# Altium PCB PCB1.PcbDoc (part 2 of 2)
Units mm, origin at the board's own origin, x right, y up, seen from the top; angles counter-clockwise.
Board outline 28 x 30 mm, 4 copper layers (Top Layer, GND, POWER, Bottom Layer), stack 0.778 mm thick; 63 components, 74 nets, 532 pads, 184 vias.
Unrouted connection lines stored in the file: 4.
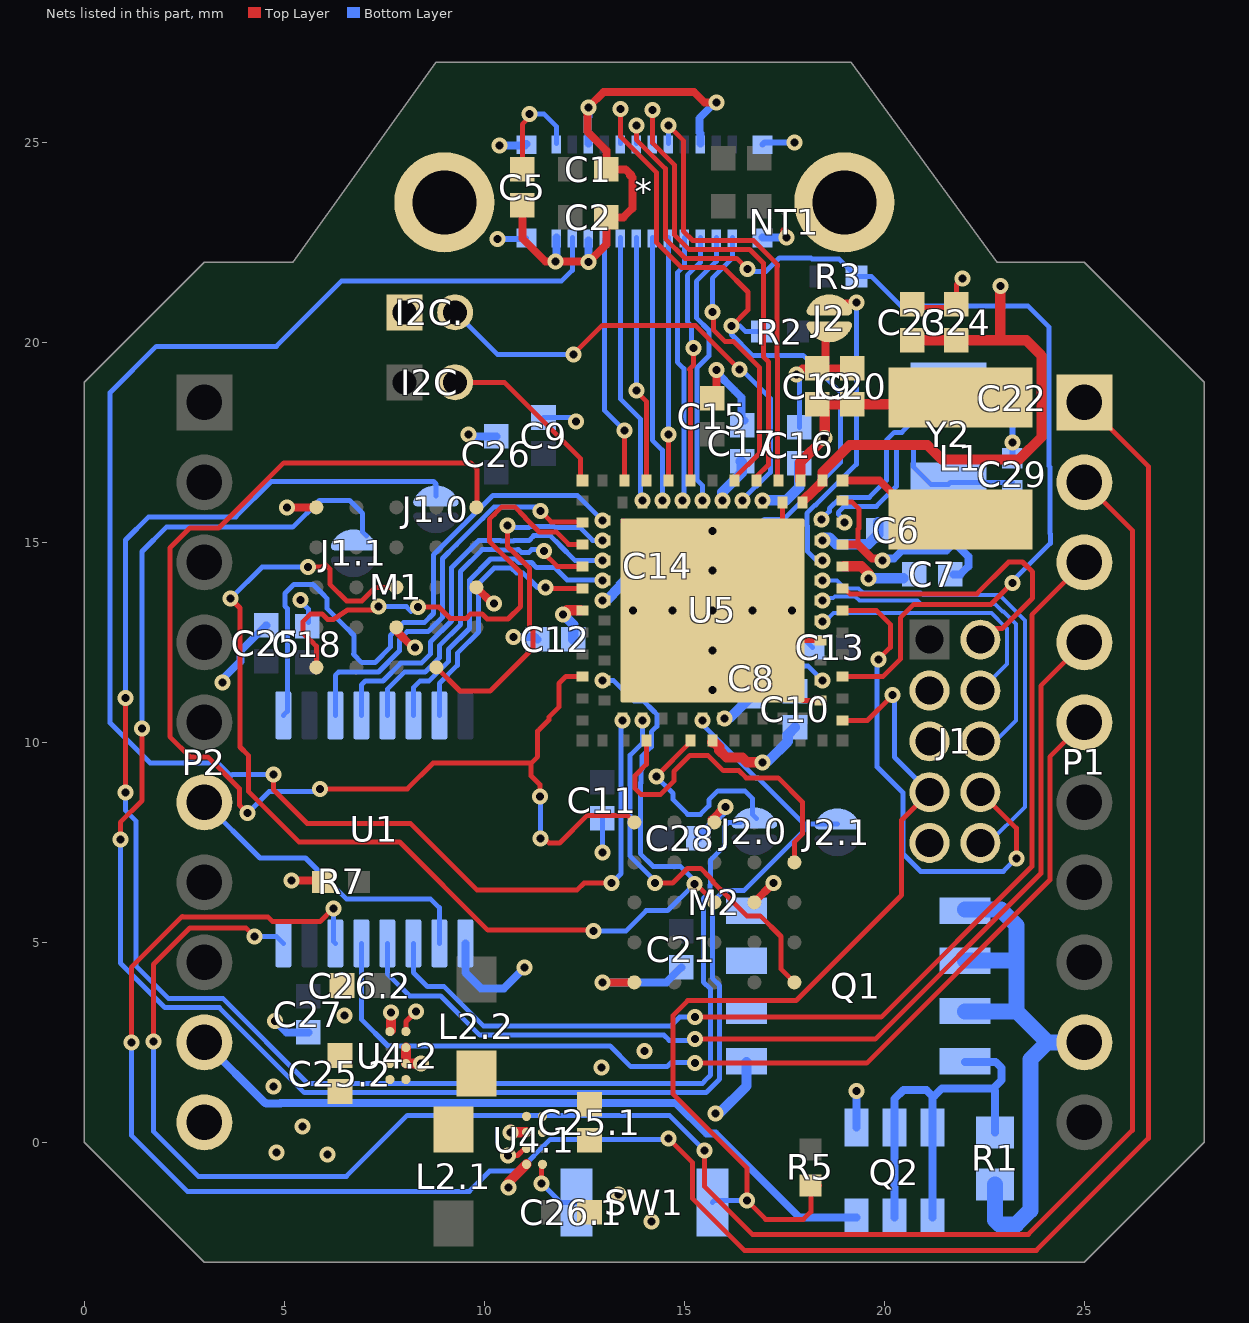
[diagram p4: the nets of this part, all layers, seen from the top]

## Via types
v1: diameter 0.4, hole 0.2, Top Layer to Bottom Layer, tented both sides, 184 vias

## Nets (pads, with @x,y where several pads share a name; then routed paths per layer and width w, separated by ;. In a path a pad name is that pad's centre, name@x,y a point inside that pad or via, vN(x,y) a via of type N, cw(c..) or ccw(c..) an arc to the next point about the centre after c; other vN are vias at no path point) (continued)
DQ7: M1.E1 M2.E1 U5.A9 | length 32.5
  Top Layer w0.125: v1(4.079,8.228) 3.874,8.433 3.874,8.845 3.082,9.637 2.643,9.637 2.137,10.143 2.137,14.137 2.14,14.14 2.137,14.143 2.137,14.857 2.643,15.363 3.357,15.363 3.36,15.36 4.988,16.988 9.661,16.988 9.813,16.836 9.813,15.888 M1.E1@9.8,15.875 ; v1(5.889,8.839) 8.075,8.839 8.716,9.48 11.172,9.48 ; v1(11.392,8.648) 11.392,8.94 11.172,9.159 11.172,9.48 ; v1@11.4,7.7 11.62,7.48 11.88,7.48 12.575,8.175 13.575,8.175 M2.E1@13.75,8 ; U5.A9@12.4,11.65 12.04,11.65 11.862,11.472 11.862,10.878 11.615,10.63 11.615,10.557 11.402,10.344 11.335,10.277 11.335,9.643 11.172,9.48
  Bottom Layer w0.125: v1@4.079,8.254 v1(4.079,8.228) 4.622,8.772 5.822,8.772 v1(5.889,8.839) ; v1(11.392,8.648) 11.37,8.626 11.4,8.596 v1@11.4,7.7
  other v1: 11.4,7.6
GND: *.0 *.3 *.10 *.13 *.15 C1.1 C2.1 C5.2 C6.1 C7.1 C8.1 C9.1 C10.1 C11.1 C12.1 C13.1 C14.1 C15.1 C16.1 C17.1 C18.1 C19.1 C20.1 C21.1 C22.1 C23.1 C24.1 C25.1 C25.1.1 C25.2.1 C26.1 C26.1.1 C26.2.1 C27.2 C28.1 C29.1 I2C..1 J1.3 J1.5 J1.9 J2.2 M1.B3 M1.C1 M1.E5 M2.B3 M2.C1 M2.E5 NT1.2 P2.10 pad.H1 pad.H2 Q2.4 R7.1 SW1.2 U1.9 U4.1.B2 U4.1.C1 U4.1.D2 U4.2.B2 U4.2.D1 U5.A31 U5.A33 U5.B21 U5.B24 U5.B32 U5.PAD | length 76.1
  Top Layer w0.125: U4.2.D1@8.04,2.77 8.04,3.02 v1(8.29,3.27) ; v1(10.598,-0.328) 10.832,-0.328 11.009,-0.15 U4.1.C1@11.054,-0.15 ; v1(11.429,-1.025) 11.429,-0.575 U4.1.D2@11.454,-0.55 ; U5.PAD@14.7,11.313 15.187,11.313 15.262,11.388 15.262,12.862 U5.PAD@15.7,13.3 ; U5.PAD@14.95,14.05 U5.PAD@15.7,13.3 ; U5.B32@17.45,16 17.45,15.05 U5.PAD@15.7,13.3 ; U5.B21@18.4,11.05 17.95,11.05 U5.PAD@16.5,12.5 ; U5.B24@18.4,12.55 16.55,12.55 U5.PAD@16.5,12.5 ; U5.A33@18.95,16.05 18.995,16.005 19.195,16.005 19.362,15.837 19.362,15.35 19.34,15.327 19.34,14.95 ; C23.1@20.625,20.875 21.8,20.875 C24.1@21.8,20.95 21.8,21.45 v1(21.95,21.6) ; U5.PAD@15.7,13.3 U5.PAD@16.5,12.5
  Top Layer w0.15: U5.PAD@13.475,15.525 U5.PAD@14.95,14.05
  Top Layer w0.2: v1(5.065,15.875) M1.E5@5.8,15.875 ; v1(5.175,6.55) 5.93,6.55 R7.1@5.97,6.51 ; M1.B3@7.8,12.875 7.795,12.875 7.795,12.795 8.225,12.365 v1(8.265,12.365) ; M1.C1@9.8,13.875 10.22,13.455 10.235,13.47 v1(10.24,13.47) ; C5.2@10.95,23.425 10.95,22.6 11.525,22.025 v1(11.775,22.025) 12.584,22.025 v1(12.605,22.004) 13.05,22.449 C2.1@13.05,23.125 13.475,23.125 13.7,23.35 13.7,24.118 13.647,24.172 ; v1(12.95,4) M2.E5@13.75,4 ; 13.664,24.189 13.529,24.325 C1.1@13.05,24.325 13.05,24.799 12.575,25.274 12.575,25.85 v1(12.6,25.875) 12.979,26.254 15.246,26.254 15.5,26 v1(15.8,26) ; C15.1@15.7,18.6 15.805,18.705 v1(15.805,19.304) ; M2.C1@15.75,8 15.684,8.066 16,8.381 16.003,8.378 v1(16.03,8.378) ; M2.B3@16.75,6 v1(17.23,6.48) ; v1@17.5,22.675 NT1.2@17.5,22.8 ; U5.A31@19,14.95 19.3,14.95
  Top Layer w0.203: v1(17.8,19.2) 17.95,19.35 C19.1@18.325,19.35 ; J2.2@18.625,20.262 18.533,20.171 18.533,19.558 C19.1@18.325,19.35 ; C20.1@19.2,19.35 C19.1@18.325,19.35 ; 19.3,14.95 19.34,14.95 19.69,14.6 20,14.6 v1@20.001,14.601
  Bottom Layer w0.125: v1(5.404,13.563) 5.369,13.563 5.6,13.333 C18.1@5.6,13 ; v1@10.279,22.579 v1(10.33,22.579) ; *.0@11.019,22.579 *.0@11.05,22.61 ; v1(11.429,-1.025) 11.904,-1.5 SW1.2@12.3,-1.5 ; C9.1@11.48,18.12 12.19,18.12 v1(12.29,18.02) ; v1(12.95,7.25) C11.1@12.95,8.1 ; U5.PAD@15.7,12.3 15.75,12.3 16,12.05 C8.1@16.675,12.05 17.343,11.382 17.661,11.382 C10.1@17.768,11.275 C10.1@17.825,11.332 ; U5.PAD@17.687,13.3 17.687,12.888 C13.1@18.2,12.375 ; C16.1@17.875,17.875 v1@17.875,19.125
  Bottom Layer w0.15: v1(10.33,22.579) *.0@11.019,22.579 ; *.0@16.95,24.94 17.01,25 v1(17.75,25) ; C29.1@23.2,17.1 C22.1@23.2,18.2
  Bottom Layer w0.2: v1(3.45,11.5) 3.375,11.5 3.9,12.025 3.9,12.278 4.547,12.925 C25.1@4.55,12.925 ; v1(4.77,3.03) 5.05,2.75 C27.2@5.6,2.75 ; U1.9@9.525,4.975 9.525,4.245 9.92,3.85 10.49,3.85 v1(11.01,4.37) ; v1(9.6,17.7) 9.65,17.65 C26.1@10.3,17.65 ; v1(10.375,24.925) 11.02,24.925 *.0@11.05,24.955 ; v1(10.73,12.63) 11.27,12.63 C12.1@11.325,12.575 ; v1@11.8,22.2 *.13@11.8,22.615 ; *.15@12.6,22.55 12.6,22.009 v1(12.605,22.004) ; *.10@12.6,24.965 12.6,25.249 12.575,25.274 12.575,25.626 12.6,25.651 v1(12.6,25.875) ; v1(12.95,4) 14.55,4 C21.1@14.925,4.375 ; C14.1@14.786,14.408 14.996,14.198 15.7,14.198 U5.PAD@15.7,13.3 U5.PAD@15.7,12.35 ; C28.1@15.35,7.6 15.35,7.621 16,8.271 v1@16,8.4 ; *.3@15.4,24.965 15.4,25.224 15.375,25.249 15.375,25.601 15.774,26 v1(15.8,26) ; v1(15.805,19.304) 15.805,19.244 16.249,18.8 16.425,18.625 16.425,18.125 C17.1@16.5,18.05 ; *.0@16.95,22.625 v1(17.55,22.625) ; Q2.4@19.3,0.375 v1(19.3,1.28) ; v1(19.95,14.55) 20,14.6 20.247,14.6 20.447,14.8 21.551,14.8 21.75,14.999 ; C6.1@20.75,15.5 21.275,15.5 21.75,15.025 21.75,14.999 ; C7.1@21.725,14.2 21.9,14.2 22.1,14.4 22.1,14.649 21.75,14.999
  other v1: 14.175,-1.975 13.35,-1.3 6.5,3.175 23.2,17.5
GPIO_A2_1V8: U1.3 U5.A2 | length 10
  Top Layer w0.125: v1(11.4,15.78) 11.67,15.51 12.39,15.51 U5.A2@12.4,15.5
  Bottom Layer w0.125: U1.3@6.275,10.675 6.275,11.675 6.36,11.76 7.352,11.76 7.877,12.285 7.877,12.575 8.069,12.767 8.594,12.767 8.638,12.812 ; 8.672,12.846 8.952,13.126 8.952,14.594 9.296,14.938 9.299,14.938 9.963,15.601 9.963,15.604 10.246,15.887 11.293,15.887 v1(11.4,15.78)
GPIO_A2_3V0: P1.1 U1.14 | length 59.4
  Top Layer w0.125: v1(1.175,2.5) 1.175,4.375 2.45,5.65 2.462,5.637 4.588,5.637 4.71,5.515 5.89,5.515 v1(6.225,5.85) ; v1(14.6,0.1) 15.2,-0.5 15.2,-1.4 16.5,-2.7 23.8,-2.7 26.6,0.1 26.6,16.9 P1.1@25,18.5
  Bottom Layer w0.125: v1(1.175,2.5) 1.175,0.175 2.575,-1.225 9.625,-1.225 10.135,-0.715 10.86,-0.715 11.649,0.074 14.626,0.074 v1(14.6,0.1) ; v1(6.225,5.85) 6.225,5.025 U1.14@6.275,4.975
GPIO_A3_1V8: U1.1 U5.B1 | length 15.4
  Bottom Layer w0.125: U1.1@4.975,10.675 5.076,10.776 5.076,13.344 5.017,13.403 5.017,13.724 5.244,13.951 5.662,13.951 5.663,13.95 5.716,13.95 6.009,13.657 6.007,13.655 6.072,13.59 6.072,13.34 6.563,12.85 6.565,12.85 6.742,12.673 6.742,12.218 6.728,12.204 6.939,11.992 7.267,11.992 7.652,12.378 7.652,12.668 7.976,12.992 8.5,12.992 8.727,13.219 8.727,14.687 9.203,15.163 9.204,15.163 9.229,15.188 9.231,15.188 9.443,15.4 9.443,15.402 9.738,15.696 9.738,15.722 9.775,15.76 9.8,15.76 10.215,16.175 12.325,16.175 v1(12.95,15.55)
GPIO_A3_3V0: P1.2 U1.16 | length 53.1
  Top Layer w0.125: v1(1.725,2.525) 1.725,4.445 2.643,5.363 4.037,5.363 v1(4.25,5.15) ; v1(15.5,-0.2) 15.5,-1.1 16.7,-2.3 23.6,-2.3 26.2,0.3 26.2,15.3 P1.2@25,16.5 P1.2@25.025,16.5
  Bottom Layer w0.125: v1(1.725,2.525) 1.725,0.275 2.85,-0.85 6.55,-0.85 8.075,0.675 14.625,0.675 v1(15.5,-0.2) ; v1(4.25,5.15) 4.8,5.15 U1.16@4.975,4.975
HYPER.RWDS: M1.C3 M2.C3 U5.B9 | length 31.2
  Top Layer w0.125: v1(3.66,13.59) 3.892,13.358 3.892,9.882 4.099,9.674 4.099,8.774 5.361,7.513 7.879,7.513 10.089,5.302 10.411,5.302 10.418,5.31 12.73,5.31 v1(12.73,5.28) v1@12.82,5.28 ; v1(5.588,14.38) 5.943,14.38 6.017,14.453 6.138,14.332 6.138,13.952 6.553,13.537 6.94,13.537 7.277,13.875 M1.C3@7.8,13.875 ; v1@15.25,6.46 15.27,6.48 M2.C3@15.75,6
  Bottom Layer w0.125: v1@3.662,13.6 4.442,14.38 v1(5.588,14.38) ; v1(12.73,5.28) 13.538,5.28 14.047,5.79 14.579,5.79 v1@15.245,6.455 ; v1(12.95,11.55) 13.225,11.55 13.738,11.037 13.975,11.037 14.231,10.781 14.313,10.7 14.313,10.4 14.175,10.262 14.175,9.887 13.946,9.658 13.946,9.334 13.912,9.3 13.912,8.979 ; 13.9,9 13.9,7.218 14.218,6.9 14.9,6.9 15.2,6.6 v1@15.2,6.5
  other v1: 15.25,6.46
Mem_\R\S\T\O\1: M1.A2 U5.B2 | length 9.1
  Top Layer w0.125: M1.A2@8.8,11.875 9.393,11.282 10.146,11.282 11.217,12.354 11.217,12.79 11.132,12.875 11.132,14.081 11.132,14.348 10.645,14.835 10.635,14.835 10.575,14.895 v1(10.575,15.425)
  Bottom Layer w0.125: v1@10.507,15.392 v1@10.6,15.392 ; v1(10.575,15.425) 10.625,15.375 11.114,15.375 11.132,15.392 11.743,15.392 11.761,15.375 12.362,15.375 12.374,15.386 ; 12.372,15.388 12.374,15.386 ; 12.375,15.388 12.374,15.386 ; v1(12.95,15.05) 12.71,15.05 12.374,15.386
Mem_\R\S\T\O\2: M2.A2 U5.A14 | length 8.1
  Top Layer w0.125: U5.A14@14.05,10 14.05,9.448 13.772,9.17 13.772,8.839 13.912,8.7 14.408,8.7 14.738,9.03 14.738,9.269 15.143,9.675 15.588,9.675 15.973,9.29 16.368,9.29 16.545,9.112 17.348,9.112 17.95,8.51 17.95,7.703 17.75,7.503 M2.A2@17.75,7
Mem_INT1: M1.A5 U5.A3 | length 12.5
  Top Layer w0.125: M1.A5@5.8,11.875 5.8,12.405 5.668,12.537 5.66,12.537 5.462,12.735 5.462,13.015 5.66,13.213 5.94,13.213 6.079,13.074 6.226,13.074 6.587,13.312 7.282,13.312 v1(7.36,13.39) ; v1(8.34,13.38) 8.862,13.38 8.892,13.35 9.144,13.098 9.545,13.098 9.66,13.213 9.94,13.213 10.07,13.082 10.592,13.082 10.907,13.397 10.907,14.174 10.907,14.245 10.125,15.027 10.125,15.575 10.25,15.7 ; 10.252,15.7 10.439,15.887 10.76,15.887 11.012,15.635 11.012,15.619 11.38,15.252 11.808,15.252 12.11,14.95 U5.A3@12.4,14.95
  Bottom Layer w0.125: v1(7.36,13.39) 8.05,13.39 8.17,13.27
Mem_INT2: M2.A5 U5.B12 | length 9.8
  Top Layer w0.125: v1(14.27,6.48) 14.705,6.48 14.845,6.62 14.887,6.662 14.89,6.662 15.075,6.847 15.097,6.847 15.1,6.85 ; 15.088,6.85 15.1,6.85 ; M2.A5@17.75,4 17.412,4.338 17.412,5.14 17.416,5.144 16.898,5.662 16.563,5.662 16.088,6.137 16.088,6.14 15.89,6.338 15.887,6.338 15.712,6.513 15.712,6.538 15.637,6.613 15.637,6.62 15.408,6.85 15.1,6.85
  Bottom Layer w0.125: v1(13.95,10.55) 13.95,9.98 13.648,9.678 13.648,7.152 14.27,6.53 v1(14.27,6.48)
Net*_12: *.12 C5.1 | length 2.7
  Top Layer w0.125: C5.1@10.95,24.325 10.95,25.45 11.13,25.63 v1(11.13,25.704)
  Bottom Layer w0.125: v1(11.13,25.704) 11.496,25.704 11.8,25.4 *.12@11.8,24.965
NetC22_2: C22.2 U5.B30 Y2.1 | length 7.2
  Top Layer w0.125: v1(18.426,15.574) U5.B30@18.45,15.55
  Bottom Layer w0.125: v1(18.426,15.574) 18.462,15.61 18.626,15.774 18.626,15.844 18.907,16.125 19.625,16.125 20.05,16.55 20.05,17.55 20.25,17.75 20.438,17.75 20.713,18.025 20.713,18.413 20.737,18.437 20.737,18.463 21.225,18.95 Y2.1@21.6,18.95 21.673,18.877 21.673,18.8 C22.2@23.2,18.8
NetC29_2: C29.2 U5.A32 Y2.2 | length 6.7
  Bottom Layer w0.125: v1(19,15.5) 19,15.551 18.851,15.7 18.851,15.751 19,15.9 19.8,15.9 20.3,16.4 20.3,17.4 20.4,17.5 20.653,17.5 20.726,17.427 20.726,16.887 21.164,16.45 Y2.2@21.6,16.45 21.65,16.5 C29.2@23.2,16.5
NetJ1.0_1: J1.0.1 J2.0.1 U5.A16 | length 47.1
  Top Layer w0.125: v1(1.025,8.75) 1.03,8.755 v1(1.03,11.11) ; v1(14.3,9.14) 14.29,9.14 U5.A16@15.15,10
  Bottom Layer w0.125: v1(1.025,8.75) 1.025,8.3 1.288,8.037 1.288,4.412 2.11,3.59 3.47,3.59 5.592,1.468 15.449,1.468 15.51,1.529 15.51,1.535 15.657,1.682 15.657,3.827 15.475,4.009 15.475,6.098 15.637,6.26 15.637,6.437 15.65,6.45 15.65,7.05 16,7.4 16,7.9 16.091,7.991 16.391,7.991 J2.0.1@16.4,8 ; v1(1.03,11.11) 1.03,15.06 1.607,15.637 3.787,15.637 4.67,16.52 8.73,16.52 8.79,16.46 J1.0.1@8.79,16.163 J1.0.1@8.79,16.16 ; v1(14.3,9.14) 14.72,8.72 14.72,8.565 15.085,8.2 15.4,8.2 15.612,8.412 15.612,8.56 15.839,8.787 16.513,8.787 16.7,8.6 16.7,8.2 J2.0.1@16.8,8.1
NetJ1.1_1: J1.1.1 J2.1.1 U5.B15 | length 46
  Top Layer w0.125: v1(0.9,7.575) 0.9,8 1.44,8.54 v1(1.44,10.35)
  Bottom Layer w0.125: v1(0.9,7.575) 0.9,4.482 2.017,3.365 3.377,3.365 5.499,1.243 15.542,1.243 15.882,1.582 15.882,3.92 15.7,4.102 15.7,6.005 15.995,6.3 16.498,6.3 17.988,7.79 17.988,7.963 ; v1(1.44,10.35) 1.44,14.77 2.05,15.38 5.21,15.38 5.877,16.047 6.633,16.047 6.96,15.72 6.96,15.255 6.972,15.243 6.985,15.23 J1.1.1@7.06,15.155 ; v1(15.45,10.55) 15.45,10.452 16.789,9.112 16.838,9.112 17.988,7.963 ; J2.1.1@18.825,7.963 17.988,7.963
NetJ2_1: J2.1 U5.B28 | length 7.9
  Top Layer w0.15: J2.1@18.625,20.92 18.705,21 v1(19.3,21)
  Bottom Layer w0.125: v1(18.45,14.55) 18.3,14.55 18.075,14.775 18.075,15.412 18.063,15.424 18.063,15.724 18.276,15.937 18.289,15.937 19.3,16.948 v1(19.3,21)
NetL1_2: L1.2 U5.D4 | length 3.4
  Top Layer w0.2: U5.D4@19,16.6 19,16.55 19.873,16.55 20.848,15.575 L1.2@21.898,15.575
NetL2.1_1: L2.1.1 U4.1.A1
NetL2.2_1: L2.2.1 U4.2.A1
NetQ1_4: Q1.4 Q2.1 Q2.2 Q2.5 Q2.6 R1.1 | length 11.4
  Bottom Layer w0.2: Q2.2@20.25,-1.875 Q2.5@20.25,0.375 20.25,1.08 20.48,1.31 21.05,1.31 21.2,1.16 ; Q2.1@21.2,-1.875 Q2.6@21.2,0.375 21.2,1.16 ; Q1.4@22.02,2.005 22.785,2.005 22.935,1.855 22.935,1.555 22.73,1.35 22.7,1.35 ; R1.1@22.77,0.25 22.77,1.28 22.7,1.35 ; 21.2,1.16 21.25,1.16 21.44,1.35 22.7,1.35
POWER_EN1: P2.9 Q2.3 | length 18.1
  Bottom Layer w0.2: P2.9@3,2.5 4.52,0.98 4.544,0.98 4.549,0.975 4.901,0.975 4.906,0.98 14.794,0.98 15.549,0.225 15.775,0.225 17.875,-1.875 Q2.3@19.3,-1.875
PULP_\R\S\T\: J1.7 R5.1 SW1.1 U5.A23 | length 23.3
  Top Layer w0.125: R5.1@18.375,-1.075 18.263,-1.187 18.163,-1.287 18.163,-1.737 17.975,-1.925 17.035,-1.925 v1(16.57,-1.46) 16.57,-0.645 14.711,1.214 14.711,3.166 15.085,3.54 17.79,3.54 20.43,6.18 20.43,8.055 J1.7@21.13,8.755 J1.7@21.13,9.03 ; U5.A23@19,10.55 19.58,10.55 v1(20.21,11.18)
  Bottom Layer w0.125: SW1.1@15.7,-1.5 15.74,-1.46 v1(16.57,-1.46) ; v1(20.21,11.18) 20.25,11.14 20.25,9.635 J1.7@21.13,8.755
PULP_CAM.D0: *.17 U5.B39 | length 6.8
  Bottom Layer w0.125: *.17@13.4,22.615 13.4,18.587 13.9,18.087 13.9,16.1 v1(13.95,16.05)
PULP_CAM.D1: *.18 U5.A42 | length 6
  Top Layer w0.125: v1@13.9,18.7 13.887,18.688 14.05,18.525 U5.A42@14.05,16.6
  Bottom Layer w0.125: v1(13.8,18.8) *.18@13.8,22.615
PULP_CAM.D2: *.19 U5.B38 | length 6.7
  Bottom Layer w0.125: *.19@14.2,22.615 14.2,19.491 14.2,17.552 14.45,17.302 v1(14.45,16.05)
PULP_CAM.D3: *.20 U5.A41 | length 6
  Top Layer w0.125: U5.A41@14.6,16.6 v1(14.6,17.7)
  Bottom Layer w0.125: v1(14.6,17.7) 14.6,17.93 14.6,19.905 14.6,20.456 *.20@14.6,22.6 *.20@14.6,22.615
PULP_CAM.D4: *.21 U5.B37 | length 6.7
  Bottom Layer w0.125: v1(14.95,16.05) 14.988,16.088 14.988,19.339 14.825,19.502 14.825,19.998 14.825,20.549 14.825,21.258 14.825,21.743 15,21.918 *.21@15,22.615
PULP_CAM.D5: *.22 U5.A40 | length 6.5
  Top Layer w0.125: U5.A40@15.15,16.6 15.15,19.3 15.125,19.325 15.23,19.43 v1(15.23,19.854)
  Bottom Layer w0.125: v1(15.23,19.854) v1@15.23,19.745 ; v1@15.25,19.725 v1@15.23,19.745 ; *.22@15.4,22.615 15.4,22 15.075,21.675 15.075,20.517 15.175,20.417 15.175,19.8 v1@15.23,19.745
PULP_CAM.D6: *.23 U5.B36 | length 7.1
  Bottom Layer w0.125: v1(15.45,16.05) 15.45,16.425 15.312,16.563 15.312,19.359 15.617,19.664 15.617,20.293 15.3,20.611 15.3,21.525 15.8,22.025 *.23@15.8,22.615
PULP_CAM.D7: *.24 U5.A38 | length 7.2
  Top Layer w0.125: v1(15.705,20.754) 15.666,20.793 15.655,20.793 15.725,20.723 15.725,20.311 16.019,20.016 16.234,20.016 16.875,19.375 ; U5.A38@16.25,16.6 16.877,17.228 16.877,19.214 16.878,19.375
  Bottom Layer w0.125: v1(15.705,20.754) 15.7,20.759 15.7,21.6 16.2,22.1 *.24@16.2,22.615
PULP_CAM.HSYNC: *.6 U5.A37 | length 12.3
  Top Layer w0.125: v1(14.2,25.803) 14.2,24.986 14.75,24.436 14.75,22.686 15.111,22.325 16.043,22.325 16.632,22.325 16.975,21.982 16.975,19.641 17.103,19.514 17.103,19.121 17.103,16.939 16.8,16.636 U5.A37@16.8,16.6
  Bottom Layer w0.125: *.6@14.2,24.965 v1(14.2,25.803)
PULP_CAM.PCLK: *.16 U5.A43 | length 6.2
  Top Layer w0.125: U5.A43@13.5,16.6 v1(13.5,17.8)
  Bottom Layer w0.125: *.16@13,22.55 13,18.3 v1(13.5,17.8)
PULP_CAM.VSYNC: *.5 U5.A36 | length 11.3
  Top Layer w0.125: v1(14.6,25.425) 14.975,25.05 14.975,22.78 15.205,22.55 16.136,22.55 16.725,22.55 17.325,21.95 17.325,21.898 17.312,21.886 17.312,19.622 17.328,19.607 17.328,19.027 17.328,16.6 U5.A36@17.35,16.6
  Bottom Layer w0.125: *.5@14.6,24.965 v1(14.6,25.425)
PULP_I2C.SCL: *.7 R3.1 U5.A25 | length 27
  Top Layer w0.125: v1(13.8,25.425) 13.8,25.068 14.525,24.343 14.525,22.593 15.018,22.1 15.95,22.1 16.309,22.1 v1(16.58,21.829) ; U5.A25@19,11.65 19.973,11.65 20.4,12.077 20.4,13.113 20.737,13.45 22.665,13.45 v1(23.2,13.985)
  Bottom Layer w0.125: *.7@13.8,24.965 v1(13.8,25.425) ; v1(16.58,21.829) 16.634,21.775 17.04,21.775 17.377,22.113 18.164,22.113 18.189,22.087 18.863,22.087 R3.1@19.3,21.65 19.675,21.65 19.85,21.475 20.413,20.912 23.588,20.912 24.12,20.38 24.12,16.905 24.137,16.888 24.137,16.268 24.148,16.257 24.148,15.215 24.15,15.213 24.15,14.975 23.2,14.025 v1(23.2,13.985)
PULP_I2C.SDA: *.8 R2.1 U5.B22 | length 22.9
  Top Layer w0.125: v1(13.405,25.829) 13.405,25.155 13.4,25.15 14.3,24.25 14.3,22.5 14.925,21.875 15.975,21.875 16.592,21.258 16.592,20.812 16.184,20.404 v1(16.18,20.404) 16.176,20.404 v1@16.163,20.39 ; v1@16.163,20.39 16.078,20.39 16.163,20.306 v1@16.163,20.39
  Bottom Layer w0.125: *.8@13.4,24.965 13.405,24.97 v1(13.405,25.829) ; v1(16.18,20.404) 16.18,20.195 16.7,19.675 17.973,19.675 18.213,19.436 18.214,19.436 18.9,18.75 18.9,16.991 17.484,15.575 17,15.575 16.287,14.862 16.287,13.129 16.706,12.71 16.864,12.71 17.283,12.292 17.283,12.133 17.514,11.903 18.098,11.903 v1(18.45,11.55) ; v1@16.196,20.404 16.396,20.404 16.525,20.275 16.935,20.275 R2.1@16.94,20.27
PULP_JTAG.\T\R\S\T\: J1.10 U5.B27 | length 11.6
  Bottom Layer w0.1: v1(18.45,14.05) 18.822,14.05 19.022,13.85 19.355,13.85 19.465,13.74 20.909,13.74 20.971,13.678 22.206,13.678 22.211,13.682 22.878,13.682 23.513,13.048 23.513,8.388 22.61,7.485 J1.10@22.4,7.485
PULP_JTAG.TCK: J1.4 U5.B25 | length 6.7
  Bottom Layer w0.1: v1(18.451,13.026) 18.532,13.026 18.734,13.228 22.674,13.228 23,12.902 23,12.911 23.063,12.849 23.063,11.958 J1.4@22.4,11.295
PULP_JTAG.TDI: J1.8 U5.A28 | length 12.8
  Top Layer w0.125: U5.A28@19,13.3 19.8,13.3 20.15,12.95 20.15,12.375 v1(19.85,12.075) ; J1.8@22.4,8.755 23.3,7.855 v1(23.3,7.1)
  Bottom Layer w0.125: v1(19.85,12.075) 19.85,12.15 19.825,12.175 19.822,12.172 19.822,9.384 20.467,8.739 20.467,7.211 20.903,6.775 22.975,6.775 v1(23.3,7.1)
PULP_JTAG.TDO: J1.6 U5.B26 | length 8.7
  Bottom Layer w0.1: v1(18.45,13.55) 18.507,13.607 18.718,13.607 18.761,13.65 19.272,13.65 19.382,13.54 20.826,13.54 20.913,13.453 22.768,13.453 22.953,13.267 22.975,13.267 23.288,12.954 23.288,10.542 22.77,10.025 J1.6@22.4,10.025
PULP_JTAG.TMS: J1.2 U5.A29 | length 7.5
  Top Layer w0.125: U5.A29@19,13.85 19.138,13.712 22.312,13.712 23.108,14.508 23.455,14.508 23.702,14.261 23.702,13.602 22.94,12.84 J1.2@22.4,12.84
PULP_SPI_1V8.MISO: U1.5 U5.A4 | length 8.1
  Top Layer w0.125: v1(11.49,14.78) 11.49,14.735 11.487,14.733 11.82,14.4 U5.A4@12.4,14.4
  Bottom Layer w0.125: U1.5@7.575,10.675 7.575,11.327 8.001,11.752 8.518,11.752 8.877,12.111 8.877,12.415 9.402,12.94 9.402,13.309 9.402,14.274 9.946,14.817 10.316,14.817 10.321,14.812 10.829,14.812 10.834,14.817 10.857,14.817 10.925,14.749 11.116,14.749 11.184,14.817 11.452,14.817 v1(11.49,14.78)
PULP_SPI_1V8.MOSI: U1.4 U5.B3 | length 9.5
  Bottom Layer w0.125: U1.4@6.925,10.675 6.925,11.435 7.025,11.535 7.465,11.535 7.907,11.977 8.425,11.977 8.652,12.204 8.652,12.508 9.177,13.033 9.177,14.367 9.852,15.042 10.41,15.042 10.414,15.037 10.736,15.037 10.74,15.042 11.117,15.042 11.225,15.15 ; 11.225,15.167 11.65,15.167 11.877,14.94 11.877,14.935 12.263,14.55 v1(12.95,14.55)
PULP_SPI_1V8.SCK: U1.6 U5.B4 | length 7.9
  Bottom Layer w0.125: U1.6@8.225,10.675 8.225,11.365 8.387,11.527 8.612,11.527 9.102,12.018 9.102,12.321 9.627,12.847 9.627,13.403 9.627,14.056 10.154,14.582 10.774,14.582 10.862,14.494 11.178,14.494 11.302,14.37 11.76,14.37 12.068,14.062 12.925,14.062 12.937,14.05 v1(12.95,14.05)
PULP_SPI_3V0.MISO: P1.4 U1.12 | length 25.7
  Top Layer w0.125: v1(15.27,2.58) 19.77,2.58 23.912,6.722 23.912,11.412 P1.4@25,12.5
  Bottom Layer w0.125: U1.12@7.575,4.975 7.575,4.215 8.132,3.658 8.909,3.658 9.889,2.677 14.493,2.677 14.62,2.55 15.24,2.55 v1(15.27,2.58)
PULP_SPI_3V0.MOSI: P1.5 U1.13 | length 25.9
  Top Layer w0.125: v1(15.27,1.98) 19.56,1.98 24.137,6.558 24.137,9.637 P1.5@25,10.5
  Bottom Layer w0.125: U1.13@6.925,4.975 6.925,3.075 7.59,2.41 13.145,2.41 13.665,1.89 14.565,1.89 14.675,2 15.25,2 v1(15.27,1.98)
PULP_SPI_3V0.SCK: P1.3 U1.11 | length 26.6
  Top Layer w0.125: v1(15.27,3.13) 19.923,3.13 23.687,6.894 23.687,13.187 P1.3@25,14.5
  Bottom Layer w0.125: U1.11@8.225,4.975 8.225,4.245 8.58,3.89 8.995,3.89 9.982,2.902 14.652,2.902 14.88,3.13 v1(15.27,3.13)
PULP_TIMER0Ch0: *.14 U5.B11 | length 40.7
  Top Layer w0.125: v1(4.725,9.2) 4.725,8.818 5.568,7.975 8.148,7.975 9.821,6.303 12.314,6.303 12.49,6.478 v1(13.18,6.478)
  Bottom Layer w0.125: v1(4.725,9.2) 3.7,9.2 3.66,9.16 3.332,9.488 1.642,9.488 0.642,10.488 0.642,18.742 1.8,19.9 4.8,19.9 6.427,21.527 11.927,21.527 12.2,21.8 *.14@12.2,22.615 ; v1(13.18,6.478) 13.423,6.721 13.423,10.523 v1(13.45,10.55)
PULP_VCC: C6.2 C7.2 C8.2 C10.2 C12.2 C14.2 C16.2 C17.2 C19.2 C20.2 L1.1 U5.A6 U5.A17 U5.A30 U5.A35 U5.B5 U5.B16 U5.B29 U5.B33 U5.B35 | length 18.6
  Top Layer w0.254: v1(11.97,13.2) 12.07,13.3 U5.A6@12.4,13.3 ; U5.A17@15.7,10 15.749,10 15.873,9.876 15.873,9.8 16.053,9.62 16.447,9.62 16.567,9.5 v1(16.95,9.5) ; U5.A35@17.9,16.55 17.9,17 18.505,17.605 v1(18.51,17.605) 18.51,18.265 C19.2@18.325,18.45 C20.2@19.2,18.45 21.723,18.45 L1.1@21.898,18.625 ; U5.A30@19,14.4 19.425,14.4 19.6,14.225 v1(19.6,14.1)
  Bottom Layer w0.254: v1(11.97,13.2) 12.225,12.945 C12.2@12.225,12.575 ; v1(12.95,13.55) 12.978,13.578 13.082,13.578 13.377,13.873 13.377,13.899 C14.2@13.886,14.408 ; v1(15.95,16.05) 15.95,16.25 16.438,16.738 16.438,17 C17.2@16.412,17.025 ; v1(16,10.6) 16.028,10.628 16.153,10.628 C8.2@16.675,11.15 ; v1(16.95,9.5) 17.009,9.441 17.009,9.506 17.041,9.538 17.105,9.538 17.585,10.017 17.585,10.192 C10.2@17.768,10.375 ; v1(16.95,16.05) 17.55,16.05 17.875,16.375 C16.2@17.875,16.975 ; v1(18.45,15.05) 18.523,15.123 18.627,15.123 18.8,14.95 19.6,14.95 19.85,15.2 C6.2@19.85,15.3 C6.2@19.85,15.5 ; v1(19.6,14.1) C7.2@20.475,14.1
Spare_I2C.SCL: I2C.2 U5.D1 | length 4.2
  Top Layer w0.125: I2C.2@9.5,19 10.5,19 12.4,17.1 U5.D1@12.4,16.6
Spare_I2C.SDA: I2C..2 U5.B34 | length 12.2
  Top Layer w0.125: v1(12.225,19.7) 12.95,20.425 15.275,20.425 v1(16.375,19.325)
  Bottom Layer w0.125: I2C..2@9.3,20.725 10.325,19.7 v1(12.225,19.7) ; v1@16.4,19.35 17.15,18.6 17.15,16.75 16.813,16.413 16.8,16.413 16.45,16.063 v1(16.45,16.05)
SPI_CS0_1V8: U1.7 U5.A5 | length 6.7
  Top Layer w0.125: v1(11.53,13.87) 11.53,13.78 11.6,13.85 U5.A5@12.4,13.85
  Bottom Layer w0.125: U1.7@8.875,10.675 8.875,11.473 9.327,11.925 9.327,12.228 9.852,12.753 9.852,13.962 10.247,14.357 10.68,14.357 10.8,14.237 10.962,14.237 11.33,13.87 v1(11.53,13.87)
SPI_CS0_3V0: P2.6 U1.10 | length 7.9
  Bottom Layer w0.125: P2.6@3,8.5 4.39,7.11 5.53,7.11 6.56,6.08 8.66,6.08 8.875,5.865 U1.10@8.875,4.975
VCOM: C23.2 C24.2 C25.1.2 C25.2.2 Q1.5 Q1.6 Q1.7 Q1.8 U4.1.A2 U4.1.B1 U4.1.D1 U4.2.A2 U4.2.B1 U4.2.C1 U4.2.D2 U5.A34 U5.B31 | length 17.9
  Top Layer w0.254: v1(7.665,3.245) 7.665,2.804 U4.2.D2@7.67,2.8 ; U4.2.C1@8.04,2.37 U4.2.B1@8.04,1.97 v1(8.415,1.97) ; v1(10.601,-1.125) 10.601,-1.004 U4.1.D1@11.054,-0.55 ; v1(10.654,0.25) 10.654,0.321 10.725,0.25 U4.1.B1@11.054,0.25 ; U5.B31@17.952,16.023 18.102,16.173 18.119,16.173 18.447,16.502 18.447,16.548 18.452,16.553 18.452,16.752 19.132,17.432 21.075,17.432 21.434,17.073 23.377,17.073 23.925,17.621 23.925,19.675 23.55,20.05 22.9,20.05 ; C23.2@20.7,20.05 C24.2@21.8,20.05 ; C24.2@21.875,20.05 22.9,20.05 ; v1(22.9,21.412) 22.9,20.05
  Bottom Layer w0.254: v1(15.775,0.725) 15.875,0.725 16.555,1.405 Q1.5@16.555,2.005
  other v1: 6.075,-0.3 4.8,-0.25 5.45,0.4 4.725,1.4 12.925,1.875 14.005,2.278
VCOM_CF: P1.9 Q1.1 Q1.2 Q1.3 R1.2 | length 14.5
  Bottom Layer w0.4: Q1.3@22.02,3.275 23.305,3.275 ; Q1.2@22.02,4.545 23.305,4.545 ; Q1.1@22.02,5.815 22.915,5.815 23.305,5.425 23.305,4.545 ; R1.2@22.77,-1.05 22.77,-1.945 22.875,-2.05 23.3,-2.05 23.65,-1.7 23.65,2.07 24.08,2.5 ; P1.9@25,2.5 24.08,2.5 ; 23.305,3.275 23.305,4.545 ; 23.305,3.275 24.08,2.5
pads on no net: M1.B5 M1.C5 M2.B5 M2.C5 P1.6 P1.7 P1.8 P1.10 P2.2 P2.3 P2.4 P2.5 P2.7 P2.8 U5.A7 U5.A13 U5.A18 U5.A19 U5.A20 U5.A21 U5.A22 U5.A24 U5.A26 U5.B6 U5.B13 U5.B17 U5.B18 U5.B19 U5.B20 U5.B23 U5.D3

## Polygon pours and split planes (outlines as drawn)
NetL2.1_1 on Top Layer "ind" (solid, pour order 130): 10.304,-0.25 10.304,0.475 11.104,0.55 11.104,0.975 7.7,0.975 7.7,-0.25
1V8 on Top Layer "2v8" (solid, pour order 132): 12.029,-2.425 8.429,-2.425 8.429,-1.05 11.179,-1.05 11.404,-1.35 12.054,-1.35 12.054,-2.3 12.054,-2.4
VCOM on Top Layer "vcom" (solid, pour order 126): 11.448,0.644 11.547,0.546 14.604,0.546 14.604,2.875 12.851,2.875 11.422,0.846
GND on Top Layer "gnd" (solid, pour order 129): 7.64,1.82 6.008,1.82 5.865,2.42 4.477,2.48 4.454,4.62 6.867,4.62 6.867,2.325 7.64,2.03
NetL2.2_1 on Top Layer "ind" (solid, pour order 131): 8.79,2.47 8.79,1.745 7.99,1.67 7.99,1.1 11.175,1.1 11.175,2.47
2V8 on Top Layer "2v8" (solid, pour order 133): 7.065,4.645 10.665,4.645 10.665,3.27 7.915,3.27 7.69,3.57 7.04,3.57 7.04,4.52 7.04,4.62
VCOM on Top Layer "vcom" (solid, pour order 127): 7.65,1.675 4.5,1.675 4.49,-0.655 6.344,-0.655 7.747,1.514 ccw(c7.612,1.543)
GND on Top Layer "gnd" (solid, pour order 128): 11.454,0.4 13.086,0.4 13.229,-0.2 14.617,-0.26 14.64,-2.4 12.227,-2.4 12.227,-0.156 11.454,0.19
2V8 on POWER (split plane): 21.442,23.027 20.432,22.018 20.4,21.976 20.38,21.927 20.373,21.875 20.373,21.45 20.38,21.398 20.4,21.349 20.432,21.307 21.432,20.307 21.474,20.275 21.523,20.255 21.575,20.248 24.091,20.248 25.264,19.075 25.275,19.049 25.307,19.007 26.198,18.116 26.198,0.984 24.191,-1.023 21.675,-1.023 21.663,-1.025 21.65,-1.023 20,-1.023 19.987,-1.025 19.975,-1.023 17.684,-1.023 16.552,0.109 16.552,1.525 16.545,1.577 16.525,1.626 16.493,1.668 15.443,2.718 15.018,3.143 14.976,3.175 14.927,3.195 14.875,3.202 13.95,3.202 13.898,3.195 13.849,3.175 13.831,3.161 13.807,3.143 13.216,2.552 13.01,2.552 12.997,2.55 12.723,2.55 12.671,2.543 12.622,2.523 12.581,2.491 11.838,1.749 9.809,1.749 9.777,1.78 9.777,2.425 9.77,2.477 9.75,2.526 9.718,2.568 8.093,4.193 8.07,4.21 9.559,5.698 12.866,5.698 13.857,4.707 13.899,4.675 13.913,4.669 13.948,4.655 14,4.648 15.241,4.648 17.598,2.291 17.598,0.55 17.605,0.498 17.625,0.449 17.657,0.407 18.082,-0.018 18.124,-0.05 18.173,-0.07 18.225,-0.077 19.275,-0.077 19.327,-0.07 19.376,-0.05 19.418,-0.018 21.293,1.857 21.325,1.899 21.345,1.948 21.352,2 21.352,7.4 21.352,11.366 21.818,11.832 22.918,12.932 22.95,12.974 22.97,13.023 22.977,13.075 22.977,14.8 22.977,15.8 22.97,15.852 22.95,15.901 22.918,15.943 22.035,16.825 22.243,17.032 22.275,17.074 22.295,17.123 22.302,17.175 22.302,17.25 22.302,18.15 22.295,18.202 22.275,18.251 22.243,18.293 21.843,18.693 21.801,18.725 21.752,18.745 21.7,18.752 20.859,18.752 20.268,19.343 20.226,19.375 20.177,19.395 20.125,19.402 19.877,19.402 19.877,20.175 19.87,20.227 19.85,20.276 19.836,20.294 19.818,20.318 17.768,22.368 17.243,22.893 17.201,22.925 17.152,22.945 17.1,22.952 16.084,22.952 15.127,23.909 15.127,26.49 18.918,26.49
PULP_VCC on POWER (split plane): 20.632,18.407 20.674,18.375 20.723,18.355 20.775,18.348 21.616,18.348 21.898,18.066 21.898,17.259 21.691,17.052 21.275,17.052 21.223,17.045 21.174,17.025 21.132,16.993 20.507,16.368 20.475,16.326 20.455,16.277 20.448,16.225 20.448,14.234 19.966,13.752 19,13.752 18.948,13.745 18.899,13.725 18.857,13.693 17.932,12.768 17.9,12.726 17.88,12.677 17.873,12.625 17.873,9.159 17.066,8.352 16.259,8.352 12.568,12.043 11.252,13.359 11.252,13.641 11.918,14.307 13.564,15.953 13.577,15.955 13.626,15.975 13.668,16.007 14.034,16.373 16,16.373 16.052,16.38 16.101,16.4 16.143,16.432 17.143,17.432 18.709,18.998 20.041,18.998
VCOM on POWER (split plane): 22.41,21.699 22.437,21.67 22.462,21.639 22.47,21.632 22.477,21.625 22.509,21.601 22.539,21.576 22.549,21.571 22.557,21.564 22.593,21.547 22.628,21.528 22.638,21.525 22.647,21.521 22.685,21.511 22.723,21.499 22.734,21.498 22.744,21.496 22.783,21.493 22.823,21.49 24.789,21.49 27.49,18.789 27.49,0.211 24.789,-2.49 12.1,-2.49 11.927,-2.316 11.927,-1.475 11.92,-1.423 11.9,-1.374 11.868,-1.332 11.826,-1.3 11.777,-1.28 11.725,-1.273 4.709,-1.273 4.077,-0.641 4.077,1.716 4.309,1.948 5.725,1.948 5.777,1.955 5.826,1.975 5.868,2.007 7.79,3.93 7.807,3.907 9.373,2.341 9.373,1.697 9.38,1.645 9.4,1.596 9.432,1.554 9.582,1.404 9.606,1.386 9.624,1.372 9.673,1.352 9.725,1.345 11.922,1.345 11.974,1.352 12.023,1.372 12.065,1.404 12.807,2.147 13.009,2.147 13.022,2.148 13.3,2.148 13.352,2.155 13.401,2.175 13.443,2.207 14.034,2.798 14.791,2.798 15.157,2.432 16.148,1.441 16.148,0.025 16.155,-0.027 16.175,-0.076 16.207,-0.118 17.457,-1.368 17.499,-1.4 17.548,-1.42 17.6,-1.427 19.975,-1.427 19.988,-1.425 20,-1.427 21.65,-1.427 21.662,-1.425 21.675,-1.427 24.275,-1.427 24.327,-1.42 24.376,-1.4 24.418,-1.368 26.543,0.757 26.575,0.799 26.595,0.848 26.602,0.9 26.602,18.2 26.595,18.252 26.575,18.301 26.561,18.319 26.543,18.343 25.636,19.25 25.625,19.276 25.593,19.318 24.318,20.593 24.276,20.625 24.227,20.645 24.175,20.652 21.659,20.652 20.777,21.534 20.777,21.791 21.683,22.697
3V0 on POWER (split plane): 4.755,21.452 4.748,21.4 4.748,17.325 4.748,15.975 4.755,15.923 4.761,15.909 4.761,11.088 4.768,11.035 4.788,10.987 4.82,10.945 6.423,9.341 6.423,5.559 5.341,4.477 0.51,4.477 0.51,18.789 3.211,21.49 4.771,21.49
1V8 on POWER (split plane): 181 vertices, not listed, extent 0.51,-2.49 22.573,26.49
GND on GND (split plane): 22.41,21.699 22.437,21.67 22.462,21.639 22.47,21.632 22.477,21.625 22.509,21.601 22.539,21.576 22.549,21.571 22.557,21.564 22.593,21.547 22.628,21.528 22.638,21.525 22.647,21.521 22.685,21.511 22.723,21.499 22.734,21.498 22.744,21.496 22.783,21.493 22.823,21.49 24.789,21.49 27.49,18.789 27.49,0.211 24.789,-2.49 3.211,-2.49 0.51,0.211 0.51,18.789 3.211,21.49 5.214,21.49 5.256,21.494 5.298,21.496 5.306,21.499 5.314,21.499 5.354,21.512 5.395,21.523 5.402,21.526 5.41,21.528 5.447,21.548 5.485,21.567 5.491,21.572 5.498,21.576 5.53,21.602 5.564,21.628 5.569,21.634 5.575,21.639 5.602,21.672 5.63,21.703 9.048,26.49 18.918,26.49

## Other copper
GND (plane layer: these items are gaps in the copper):
  lines w0.4: 11.075,25.825 11.075,21.875 11.475,21.475 15.9,21.475 16.05,21.625 16.05,23.975 ; 16.075,24 17.25,24 ; 16.075,24.025 16.075,25.85 ; 17.3,24.025 17.3,25.85
POWER (plane layer: these items are gaps in the copper):
  lines w0.4: 0.425,4.225 0.475,4.275 5.425,4.275 6.625,5.475 6.625,9.425 4.962,11.088 4.962,15.963 4.95,15.975 4.95,17.325 4.95,21.4 ; 7.95,4.05 9.575,2.425 9.575,1.697 9.725,1.547 11.922,1.547 12.723,2.348 13.009,2.348 13.01,2.35 13.3,2.35 13.95,3 14.875,3 15.3,2.575 16.35,1.525 16.35,0.025 17.6,-1.225 19.975,-1.225 ; 12.075,-2.75 11.725,-2.4 11.725,-1.475 7.425,-1.475 4.625,-1.475 3.875,-0.725 3.875,1.8 4.225,2.15 5.725,2.15 9.475,5.9 12.95,5.9 14,4.85 15.325,4.85 17.8,2.375 17.8,0.55 18.225,0.125 18.8,0.125 19.275,0.125 21.15,2 21.15,7.4 21.15,11.45 21.675,11.975 22.775,13.075 22.775,14.8 22.775,15.8 21.725,16.85 21.275,16.85 20.65,16.225 20.65,14.15 20.05,13.55 19,13.55 18.075,12.625 18.075,9.075 17.15,8.15 16.175,8.15 12.425,11.9 ; 14.925,26.725 14.925,23.825 16,22.75 17.1,22.75 17.625,22.225 19.675,20.175 19.675,19.275 ; 18.55,19.2 20.125,19.2 20.775,18.55 21.7,18.55 22.1,18.15 22.1,17.25 22.1,17.175 21.75,16.825 ; 18.625,19.2 17,17.575 ; 20,-1.225 21.65,-1.225 ; 21.675,-1.225 24.275,-1.225 26.4,0.9 26.4,18.2 25.45,19.15 25.45,19.175 24.175,20.45 21.575,20.45 20.575,21.45 20.575,21.875 21.825,23.125 21.825,23.175 ; 21.7,16.825 21.7,16.85 ; 27.975,5 27.975,11.575 ; 12.425,11.9 12.425,11.9 ; 12.425,11.9 11.05,13.275 11.05,13.725 11.775,14.45 13.475,16.15 13.525,16.15 13.95,16.575 15.575,16.575 16,16.575 17,17.575 ; 17,17.575 17,17.575

## Silkscreen, mask and mechanical layers (free items; w line width, h text height)
Top Overlay:
  text "GND" at 4.775,20.375 h0.7
  text "1V8" at 4.825,18.65 h0.7
  text "SCL" at 10.775,18.65 h0.7
  text "GND" at 20.9,4.525 h0.7 r90
  text "Top" at 22.025,-1.7 h1
Bottom Overlay:
  text "Bot" at 5.7,-2.075 h1
Mechanical 4:
  the board outline again, w0
Top Mechanical 12/Mechanical 22:
  circle w0.254: c14,9.5 r0.358
  lines w0.1: 0,0 3,-3 25,-3 28,0 28,19 25,22 21.25,22 20.75,22.5 17.75,25.5 10.25,25.5 6.75,22 3,22 0,19 0,0
Bottom Mechanical 12/Mechanical 22 (Mech22):
  lines w0.1: 12.475,22.525 12.475,27.525 15.5,27.525 15.5,22.525 ; 12.5,22.5 15.5,22.5
  text "ANT" at 14.7,27 h1.52 r90